# Altium PCB core51822.PcbDoc
Units mil, origin at the board's own origin, x right, y up, seen from the top; angles counter-clockwise.
Board outline 6000 x 4000 mil, 2 copper layers (Top Layer, Bottom Layer); 2 components, 0 nets, 37 pads, 0 vias.
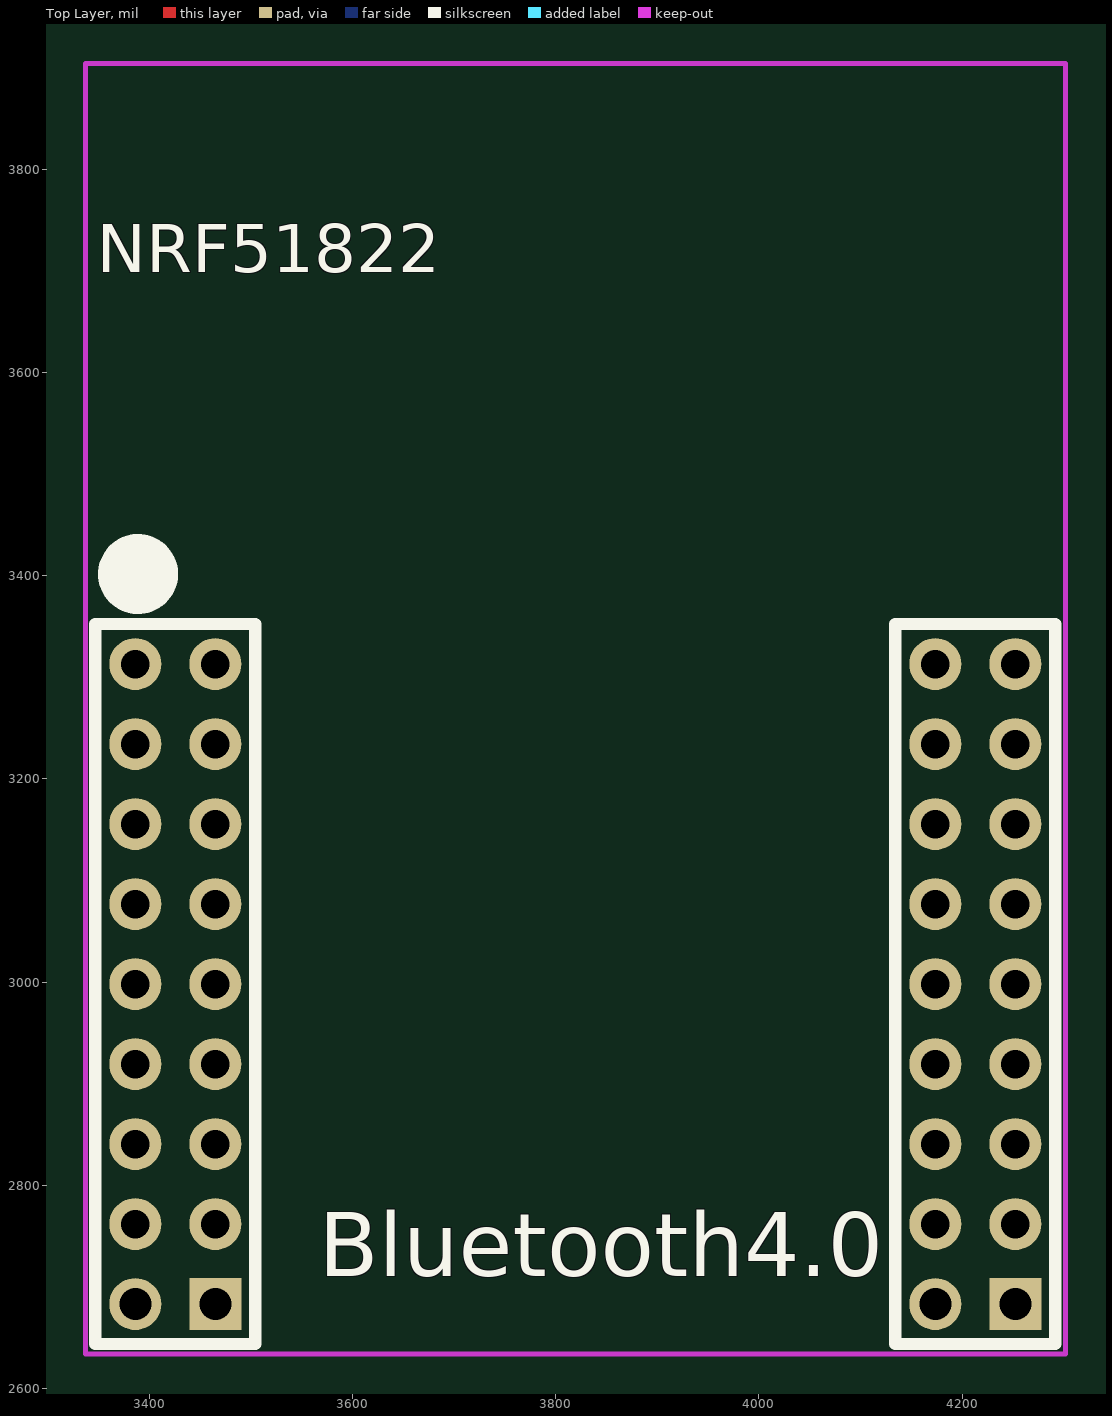
[diagram p0: Top Layer view]
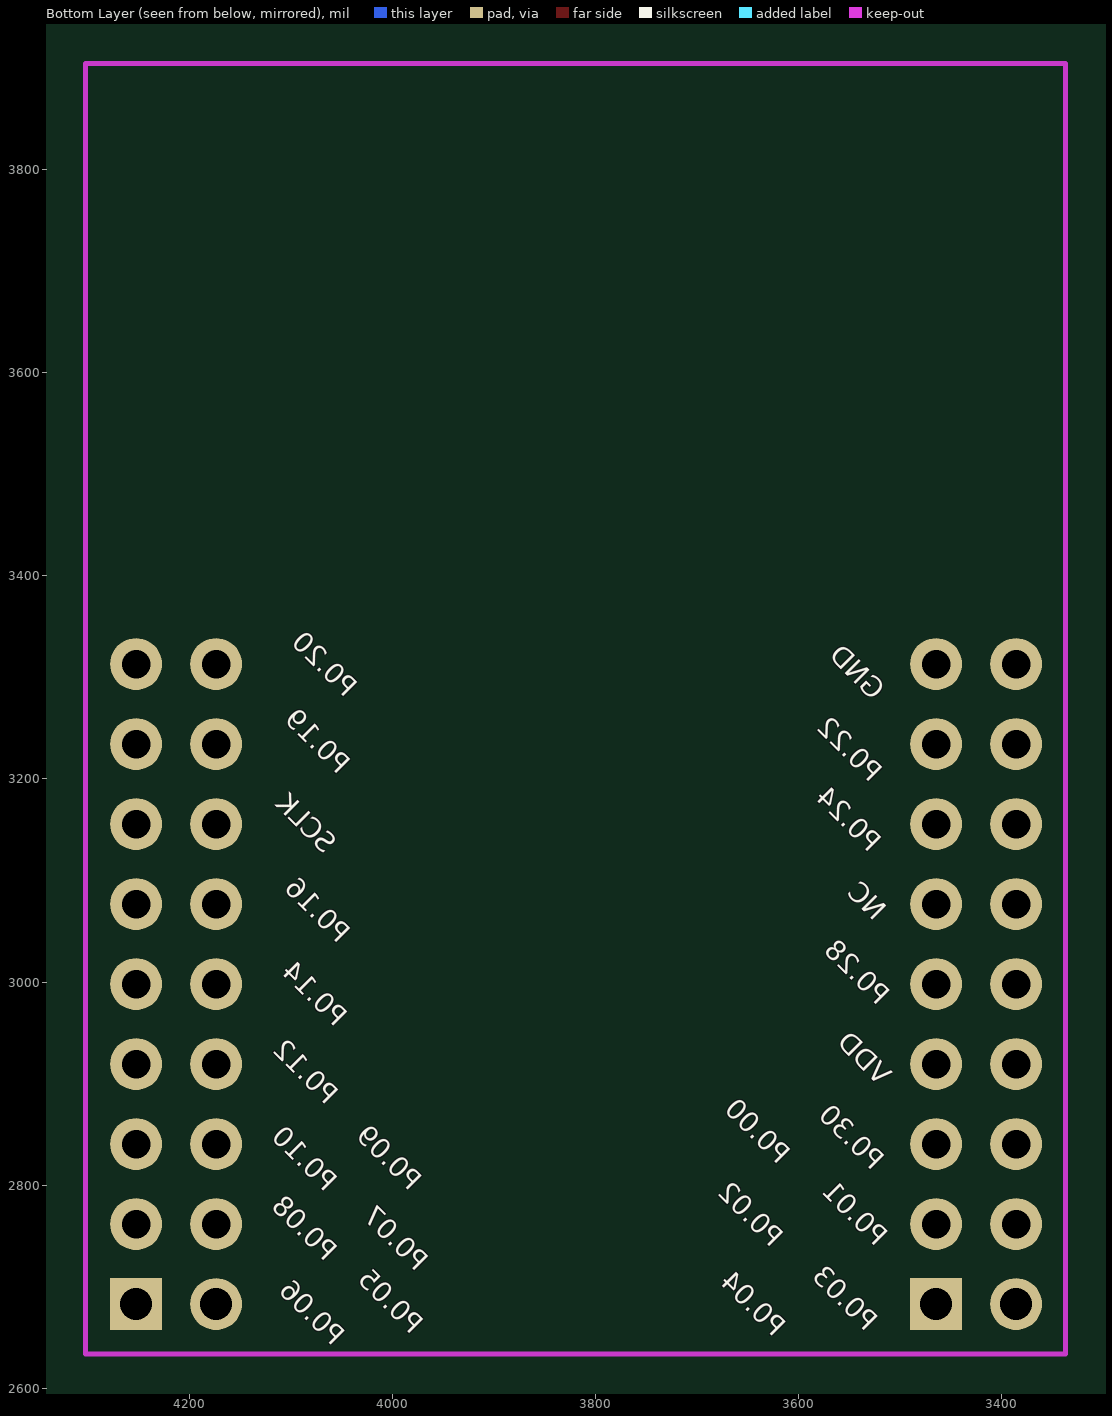
[diagram p1: Bottom Layer view, seen from below]

## Layer stack, top to bottom
Top Solder: solder mask 0.4, Solder Resist, Dk 3.5
Top Layer: signal copper 1.4
Dielectric 1: dielectric 12.6, FR-4, Dk 4.8
Bottom Layer: signal copper 1.4
Bottom Solder: solder mask 0.4, Solder Resist, Dk 3.5

## Board outline
1000,1000 7000,1000 7000,5000 1000,5000

## Design rules (kind name [scope] priority, off if disabled: settings)
Clearance [All] p1: gap=10
PolygonConnect [All] p1: connectstyle=Relief reliefconductorwidth=10 reliefentries=4 polygonreliefangle="90 Angle" airgapwidth=10
RoutingVias [All] p1: holewidth=28 width=50 viastyle="Through Hole" minholewidth=28 minwidth=50 maxholewidth=28 maxwidth=50
SolderMaskExpansion [All] p1: expansion=4
Width [All] p1: maxlimit=10 minlimit=10 preferedwidth=10
30 further rules are at their usual default settings.

## Components (designator, comment, footprint, x,y, rotation, side; value= is the part's Value field where it differs from the comment)
? "" IDC20 4252.24,2683.15 r90 top
? "" IDC20 3464.84,2683.15 r90 top

## Footprints (in the part's own frame and the unit in brackets; to place one, negate y for a bottom-side part, rotate by r counter-clockwise, add the part's x,y. Pads: shape width x height; smd on the part's side, far side on the other; paste and mask are expansions set on the pad)
IDC20 [mm]
  rect 1.3x1.3 hole 0.8: 1(0,0)
  round 1.3 hole 0.8: 2(0,2)
  round 1.3 hole 0.711: 3(2,0) 4(2,2) 5(4,0) 6(4,2) 7(6,0) 8(6,2) 9(8,0) 10(8,2) 11(10,0) 12(10,2) 13(12,0) 14(12,2) 15(14,0) 16(14,2) 17(16,0) 18(16,2)
  silkscreen extent -1,-1 17,3

## Free pads (board coordinates)
  round 78.74 on Top Overlay: ""(3388.46,3401.65)

## Nets (pads, with @x,y where several pads share a name; then routed paths per layer and width w, separated by ;. In a path a pad name is that pad's centre, name@x,y a point inside that pad or via, vN(x,y) a via of type N, cw(c..) or ccw(c..) an arc to the next point about the centre after c; other vN are vias at no path point)
pads on no net: ?.1 ?.2 ?.3 ?.4 ?.5 ?.6 ?.7 ?.8 ?.9 ?.10 ?.11 ?.12 ?.13 ?.14 ?.15 ?.16 ?.17 ?.18

## Keep-outs
Keep-Out Layer:
  lines w5: 3337.28,2633.94 3337.28,3904.02 4301.85,3904.02 4301.85,2633.94 3337.28,2633.94

## Silkscreen, mask and mechanical layers (free items; w line width, h text height)
Top Overlay:
  circle w39.37: c3388.86,3401.65 r19.68
  text "NRF51822" at 3348.31,3698.9 h47.24
  text "Bluetooth4.0" at 3566.81,2710.71 h62.99
Bottom Overlay:
  text "P0.20" at 4046.34,3279.21 h19.68 r45
  text "GND" at 3527.05,3276.46 h19.68 r45
  text "P0.19" at 4053.43,3203.62 h19.68 r45
  text "P0.22" at 3529.41,3195.75 h19.68 r45
  text "P0.24" at 3530.59,3126.85 h19.68 r45
  text "SCLK" at 4067.2,3125.28 h19.68 r45
  text "NC" at 3525.47,3059.53 h19.68 r45
  text "P0.16" at 4053.43,3037.09 h19.68 r45
  text "P0.28" at 3522.32,2976.06 h19.68 r45
  text "P0.14" at 4056.18,2955.2 h19.68 r45
  text "VDD" at 3520.75,2896.93 h19.68 r45
  text "P0.12" at 4064.84,2878.43 h19.68 r45
  text "P0.00" at 3619.96,2819.76 h19.68 r45
  text "P0.30" at 3527.83,2813.86 h19.68 r45
  text "P0.09" at 3982.95,2793.78 h19.68 r45
  text "P0.10" at 4066.02,2792.6 h19.68 r45
  text "P0.01" at 3524.29,2739.06 h19.68 r45
  text "P0.02" at 3627.05,2737.87 h19.68 r45
  text "P0.08" at 4066.02,2724.49 h19.68 r45
  text "P0.07" at 3976.65,2714.25 h19.68 r45
  text "P0.03" at 3534.13,2655.2 h19.68 r45
  text "P0.05" at 3981.38,2652.44 h19.68 r45
  text "P0.04" at 3624.68,2650.08 h19.68 r45
  text "P0.06" at 4058.54,2641.02 h19.68 r45